# Altium PCB Copy of PCB1.PcbDoc (part 2 of 3)
Units mil, origin at the board's own origin, x right, y up, seen from the top; angles counter-clockwise.
Board outline 3937.01 x 3937.01 mil, 4 copper layers (L1, L2, L3, L4), stack 61.822 mil thick; 181 components, 253 nets, 1103 pads, 337 vias.
Unrouted connection lines stored in the file: 142.
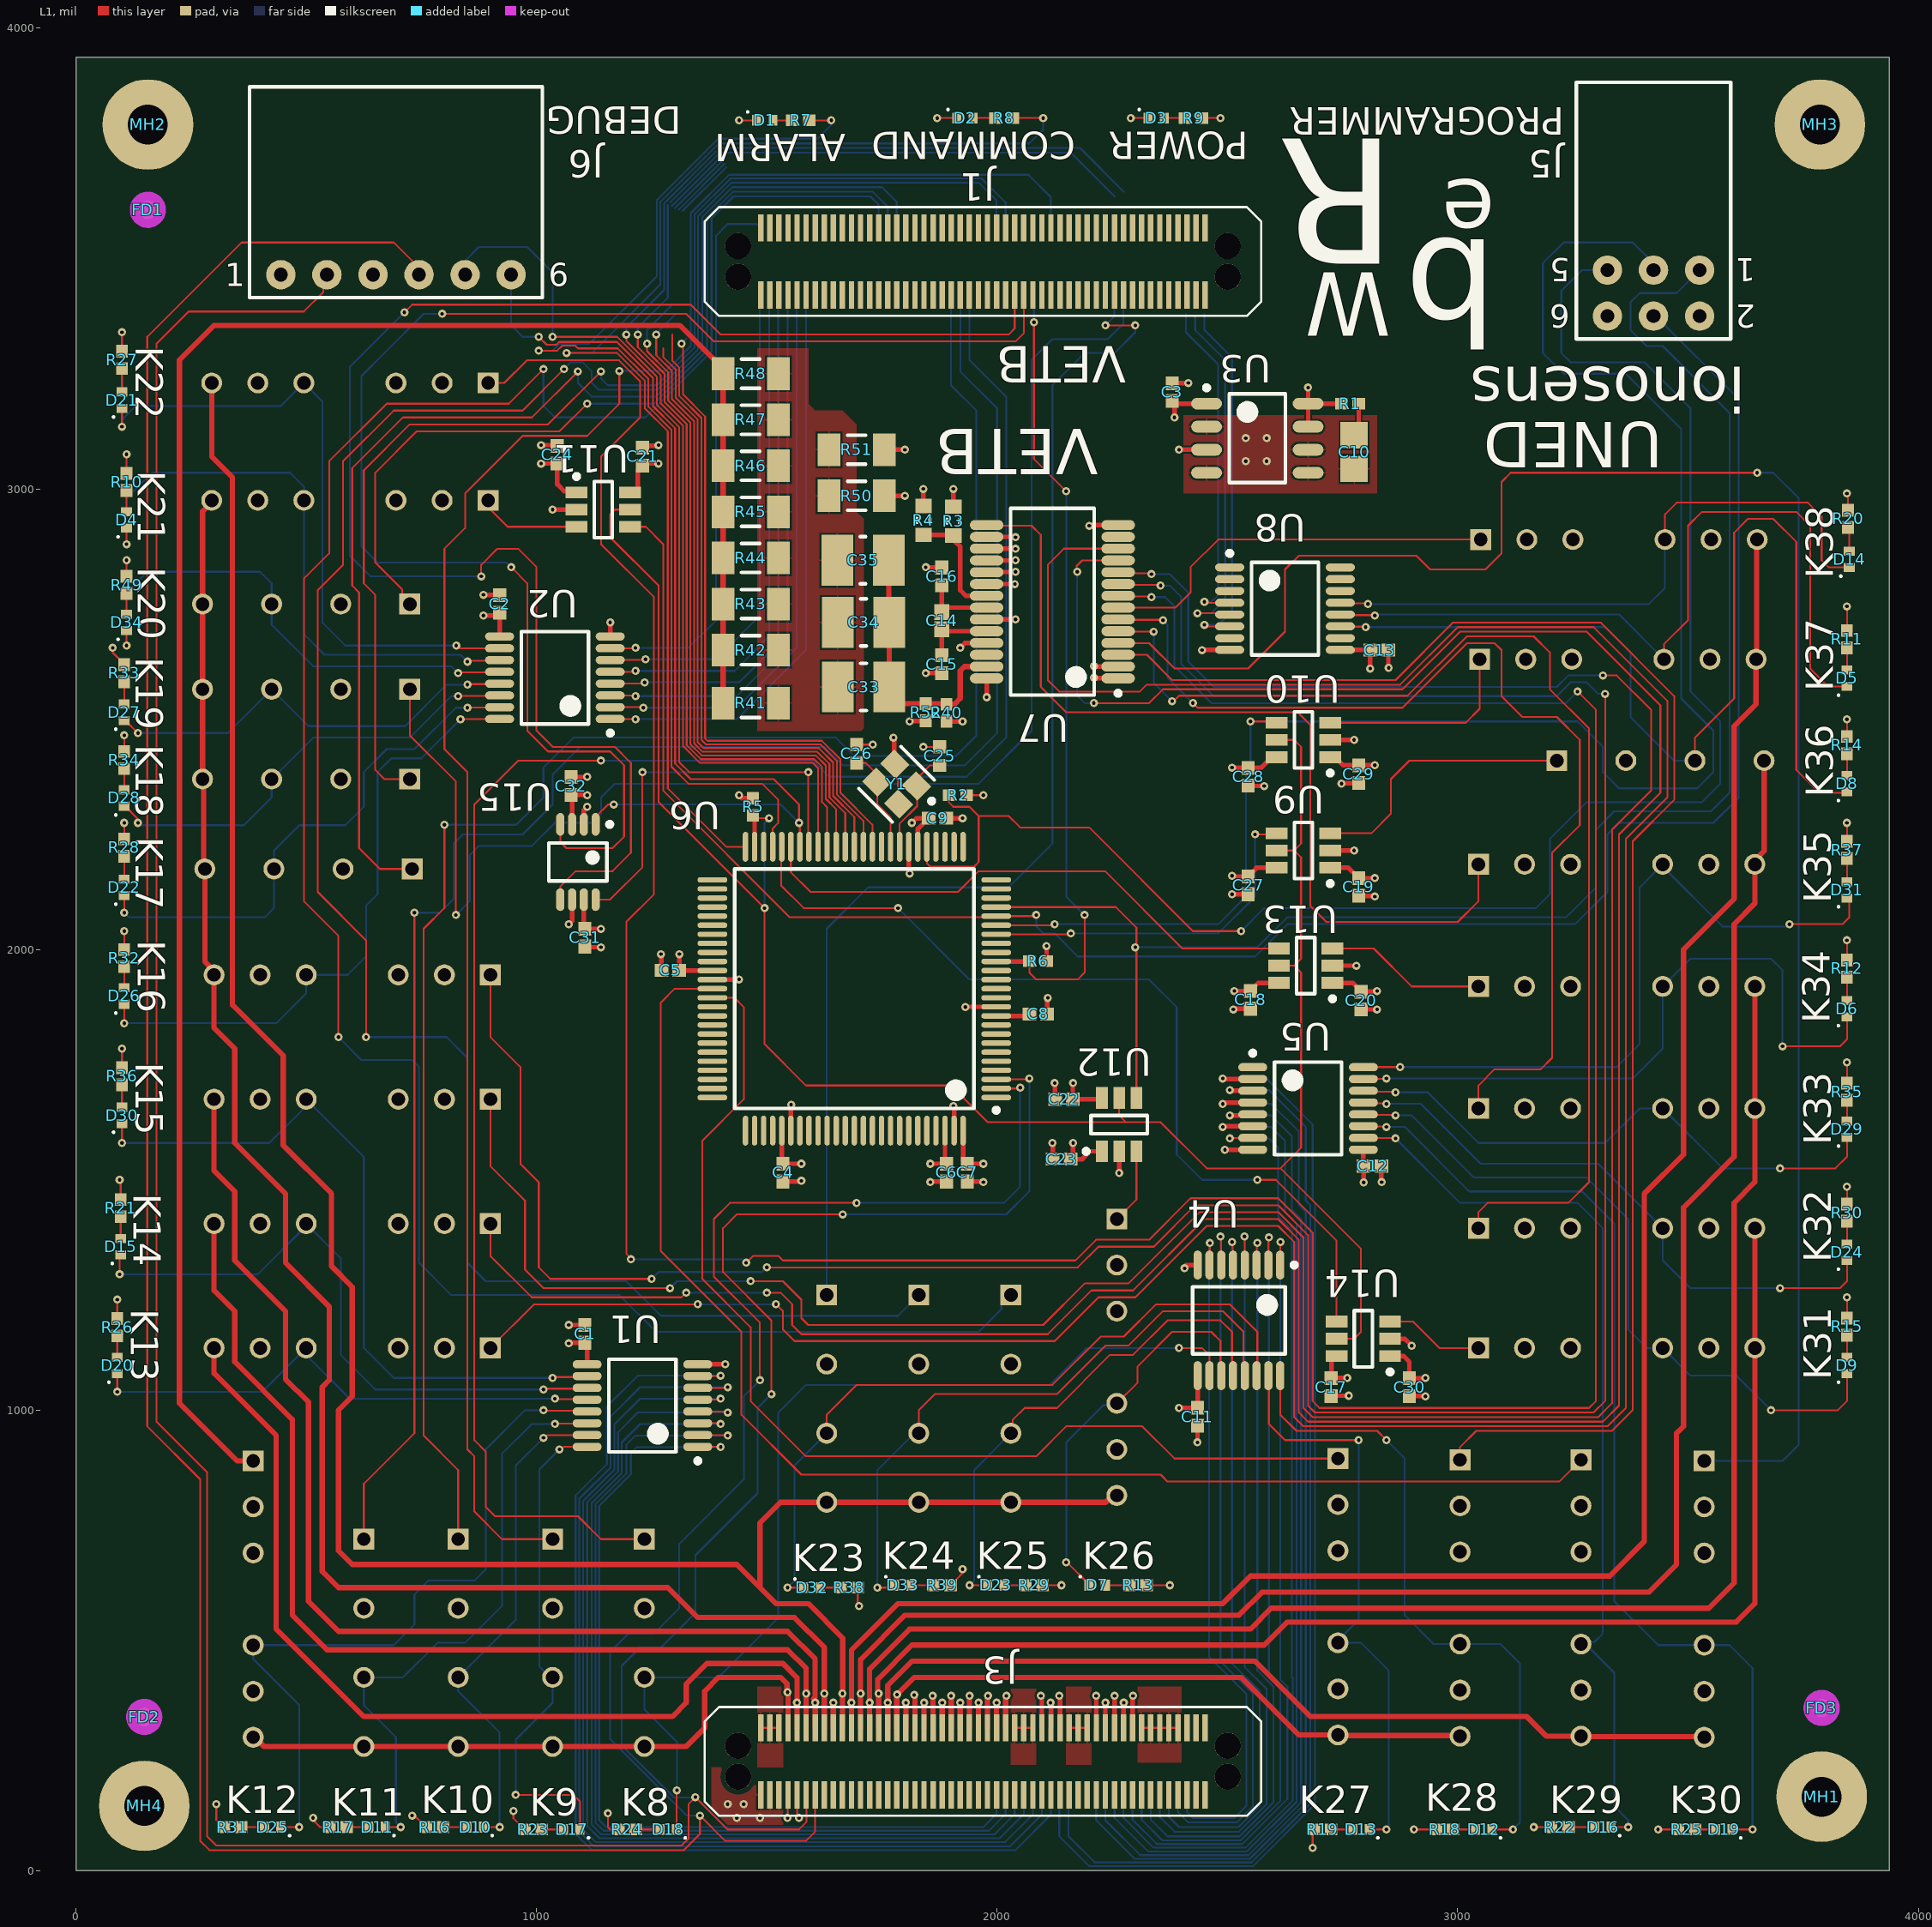
[diagram p0: L1 view]

## Via types
v1: diameter 17.72, hole 7.87, L1 to L4, 337 vias

## Nets (pads, with @x,y where several pads share a name; then routed paths per layer and width w, separated by ;. In a path a pad name is that pad's centre, name@x,y a point inside that pad or via, vN(x,y) a via of type N, cw(c..) or ccw(c..) an arc to the next point about the centre after c; other vN are vias at no path point) (continued)
COIL14: D15.1 K14.3 U1.11 | length 1380.3
  L1 w4: v1(95,1295) 95,1335.06 D15.1@97.32,1337.38 ; v1(1015,1045) 1016.69,1046.69 1108.23,1046.69 U1.11@1109.92,1048.39
  L4 w4: v1(95,1295) 395,1295 500,1400 K14.3@500,1405 575,1330 575,1120 650,1045 v1(1015,1045)
COIL15: D30.1 K15.3 U1.10 | length 1595.8
  L1 w4: v1(100,1580) D30.1@100,1622.38 ; v1(1035,1070) 1036.99,1071.99 1107.93,1071.99 U1.10@1109.92,1073.98
  L4 w4: v1(100,1580) 420,1580 492.1,1652.1 492.1,1667.1 K15.3@500,1675 625,1550 625,1135 690,1070 v1(1035,1070)
COIL16: D26.1 K16.3 U2.16 | length 1372.9
  L1 w4: v1(105,1840) D26.1@105,1881.3 ; v1(835,2500) 835.22,2500.22 919.7,2500.22 U2.16@919.92,2500.43
  L4 w4: v1(105,1840) 435,1840 500,1905 K16.3@500,1945 590,1945 630,1985 630,2095 655,2120 655,2385 685,2415 750,2415 v1(835,2500)
COIL17: D22.1 K17.3 U2.15 | length 1162.5
  L1 w4: v1(105,2080) D22.1@105,2117.38 ; v1(850,2525) 850.51,2525.51 919.41,2525.51 U2.15@919.92,2526.02
  L4 w4: v1(105,2080) 115,2070 410,2070 430,2090 K17.3@430,2175 430,2215 485,2270 585,2270 625,2310 625,2385 675,2435 735,2435 825,2525 v1(850,2525)
COIL18: D28.1 K18.3 U2.14 | length 982.8
  L1 w4: D28.1@105,2311.3 106.97,2311.3 132.38,2285.89 132.38,2277.62 v1(135,2275) ; v1(830,2550) 830.81,2550.81 919.11,2550.81 U2.14@919.92,2551.61
  L4 w4: v1(135,2275) 140,2270 365,2270 425,2330 K18.3@425,2370 425,2380 435,2380 515,2460 725,2460 815,2550 v1(830,2550)
COIL19: D27.1 K19.3 U2.13 | length 936.9
  L1 w4: D27.1@105,2497.38 106.97,2497.38 134.35,2470 v1(135,2470) ; v1(850,2575) 851.1,2576.1 918.82,2576.1 U2.13@919.92,2577.2
  L4 w4: v1(135,2470) 330,2470 K19.3@425,2565 505,2485 715,2485 805,2575 v1(850,2575)
COIL20: D34.1 K20.3 U2.12 | length 1120.9
  L1 w4: v1(110,2660) D34.1@110,2692.38 ; v1(830,2600) 831.4,2601.4 918.52,2601.4 U2.12@919.92,2602.8
  L4 w4: v1(110,2660) 110,2775 155,2820 400,2820 425,2795 K20.3@425,2750 425,2705 515,2615 815,2615 v1(830,2600)
COIL21: D4.1 K21.3 U2.11 | length 1326.4
  L1 w4: v1(110,2880) D4.1@110,2915 ; v1(850,2625) 851.69,2626.69 918.23,2626.69 U2.11@919.92,2628.39
  L4 w4: v1(110,2880) 110,2980 165,3035 465,3035 495,3005 K21.3@495,2975 495,2685 540,2640 835,2640 v1(850,2625)
COIL22: D21.1 K22.3 U2.10 | length 1427.8
  L1 w4: v1(100,3135) D21.1@100,3175 ; v1(825.86,2660) 828.71,2660 834.74,2653.98 U2.10@919.92,2653.98
  L4 w4: v1(100,3135) 100,3150 130,3180 445,3180 K22.3@495,3230 535,3190 535,2710 585,2660 v1(825.86,2660)
COIL23: D32.1 K23.3 U4.14 | length 1600.2
  L1 w4: v1(1545,615) D32.1@1580,615 ; K23.3@1630,950 1630,990 1695,1055 2120,1055 2225,1160 2275,1160 2345,1230 2505,1230 2565,1170 2565,1076.54 U4.14@2563.39,1074.92
  L4 w4: v1(1545,615) 1560,630 1560,880 K23.3@1630,950
COIL24: D33.1 K24.3 U4.13 | length 1376.5
  L1 w4: v1(1740,615) 1772.38,615 D33.1@1777.38,620 ; K24.3@1830,950 1830,1000 1865,1035 2130,1035 2235,1140 2285,1140 2360,1215 2490,1215 2535,1170 2535,1106.76 2535.17,1106.59 2535.17,1077.55 U4.13@2537.8,1074.92
  L4 w4: v1(1740,615) 1740,870 1820,950 K24.3@1830,950
COIL25: D23.1 K25.3 U4.12 | length 1108.4
  L1 w4: v1(1940,620) D23.1@1979.57,620 ; K25.3@2030,950 2033.64,953.64 2033.64,978.64 2060,1005 2130,1005 2245,1120 2295,1120 2370,1195 2485,1195 2510,1170 U4.12@2510,1074.92
  L4 w4: v1(1940,620) 1950,630 1950,870 K25.3@2030,950
COIL26: D7.1 K26.3 U4.11 | length 869.7
  L1 w4: v1(2150,670) 2151.54,670 2199.57,621.97 D7.1@2199.57,620 ; K26.3@2260,1015 2305,1060 2305,1095 2380,1170 2465,1170 2485,1150 U4.11@2485,1074.92
  L4 w4: v1(2150,670) 2150,930 2231.36,1011.36 2256.36,1011.36 K26.3@2260,1015
COIL27: D13.1 K27.3 U4.15 | length 1304
  L1 w4: U4.15@2590,1085 2590,970 2625,935 v1(2785,935) ; D13.1@2807.62,90 v1(2845,90)
  L4 w4: v1(2785,935) 2785,545 2740,500 K27.3@2740,495 2790,495 2850,435 2850,92.34 2847.66,90 v1(2845,90)
COIL28: D12.1 K28.3 U4.16 | length 1440.2
  L1 w4: U4.16@2614.57,1074.92 2614.57,990.43 2650,955 2825,955 v1(2845,935) ; D12.1@3073.92,90 v1(3120,90)
  L4 w4: v1(2845,935) 2885,895 2885,555 2947.68,492.32 K28.3@3005,492.32 3092.68,492.32 3135,450 3135,105 v1(3120,90)
COIL29: D16.1 K29.3 U5.10 | length 2020.9
  L1 w4: U5.10@2795.08,1591.02 2795.59,1590.51 2864.49,1590.51 v1(2865,1590) ; D16.1@3332.62,95 v1(3370,95)
  L4 w4: v1(2865,1590) 3005,1450 3260,1450 3315,1395 3315,515 3296.24,496.24 3271.47,496.24 K29.3@3267.6,492.36 3277.64,492.36 3340,430 3340,140 3370,110 v1(3370,95)
COIL30: D19.1 K30.3 U5.11 | length 2207.2
  L1 w4: U5.11@2795.08,1616.61 2795.89,1615.81 2844.19,1615.81 v1(2845,1615) ; D19.1@3595.43,90 v1(3640,90)
  L4 w4: v1(2845,1615) 2885,1615 3025,1475 3270,1475 3340,1405 3340,585 3435,490 K30.3@3535,490 3590,490 3640,440 v1(3640,90)
COIL31: D9.1 K31.3 U5.12 | length 1524.4
  L1 w4: U5.12@2795.08,1642.2 2796.18,1641.1 2863.9,1641.1 v1(2865,1640) ; v1(3680,1000) 3825,1000 3845,1020 D9.1@3845,1079.57
  L4 w4: v1(2865,1640) 2900,1640 3035,1505 3280,1505 3370,1415 3370,1175 3410,1135 K31.3@3445,1135 3505,1075 3605,1075 v1(3680,1000)
COIL32: D24.1 K32.3 U5.13 | length 1309
  L1 w4: U5.13@2795.08,1667.8 2796.48,1666.4 2843.6,1666.4 v1(2845,1665) ; v1(3700,1265) 3830,1265 3845,1280 D24.1@3845,1325
  L4 w4: v1(2845,1665) 2920,1665 3050,1535 3305,1535 K32.3@3445,1395 3445,1325 3505,1265 v1(3700,1265)

## Text inside footprints (layer, text, board x,y; h text height)
J1: Mechanical 15 "1" at 1499.57,3658.15 h39.37 r180; Mechanical 15 "2" at 1499.57,3363.27 h39.37 r180
J2: Mechanical 15 "1" at 1499.57,3329.02 h39.37; Mechanical 15 "2" at 1499.57,3623.9 h39.37
J3: Mechanical 15 "1" at 1499.57,402.24 h39.37 r180; Mechanical 15 "2" at 1499.57,107.36 h39.37 r180
J4: Mechanical 15 "1" at 1499.57,73.11 h39.37; Mechanical 15 "2" at 1499.57,367.99 h39.37
J5: Top Overlay "1" at 3646.65,3500 h50 r180; Top Overlay "5" at 3243.86,3500 h50 r180; Top Overlay "6" at 3243.86,3400 h50 r180; Top Overlay "2" at 3646.65,3400 h50 r180; Mechanical 13 "1" at 3646.65,3500 h50 r180; Mechanical 13 "2" at 3646.65,3400 h50 r180; Mechanical 13 "5" at 3243.86,3500 h50 r180; Mechanical 13 "6" at 3243.86,3400 h50 r180
J6: Top Overlay "6" at 1026.14,3440 h50; Top Overlay "1" at 323.35,3440 h50; Mechanical 13 "6" at 1026.14,3440 h50; Mechanical 13 "1" at 323.35,3440 h50